# EAGLE board Schematic_EBook_v47 (EAGLE 9.7.0)
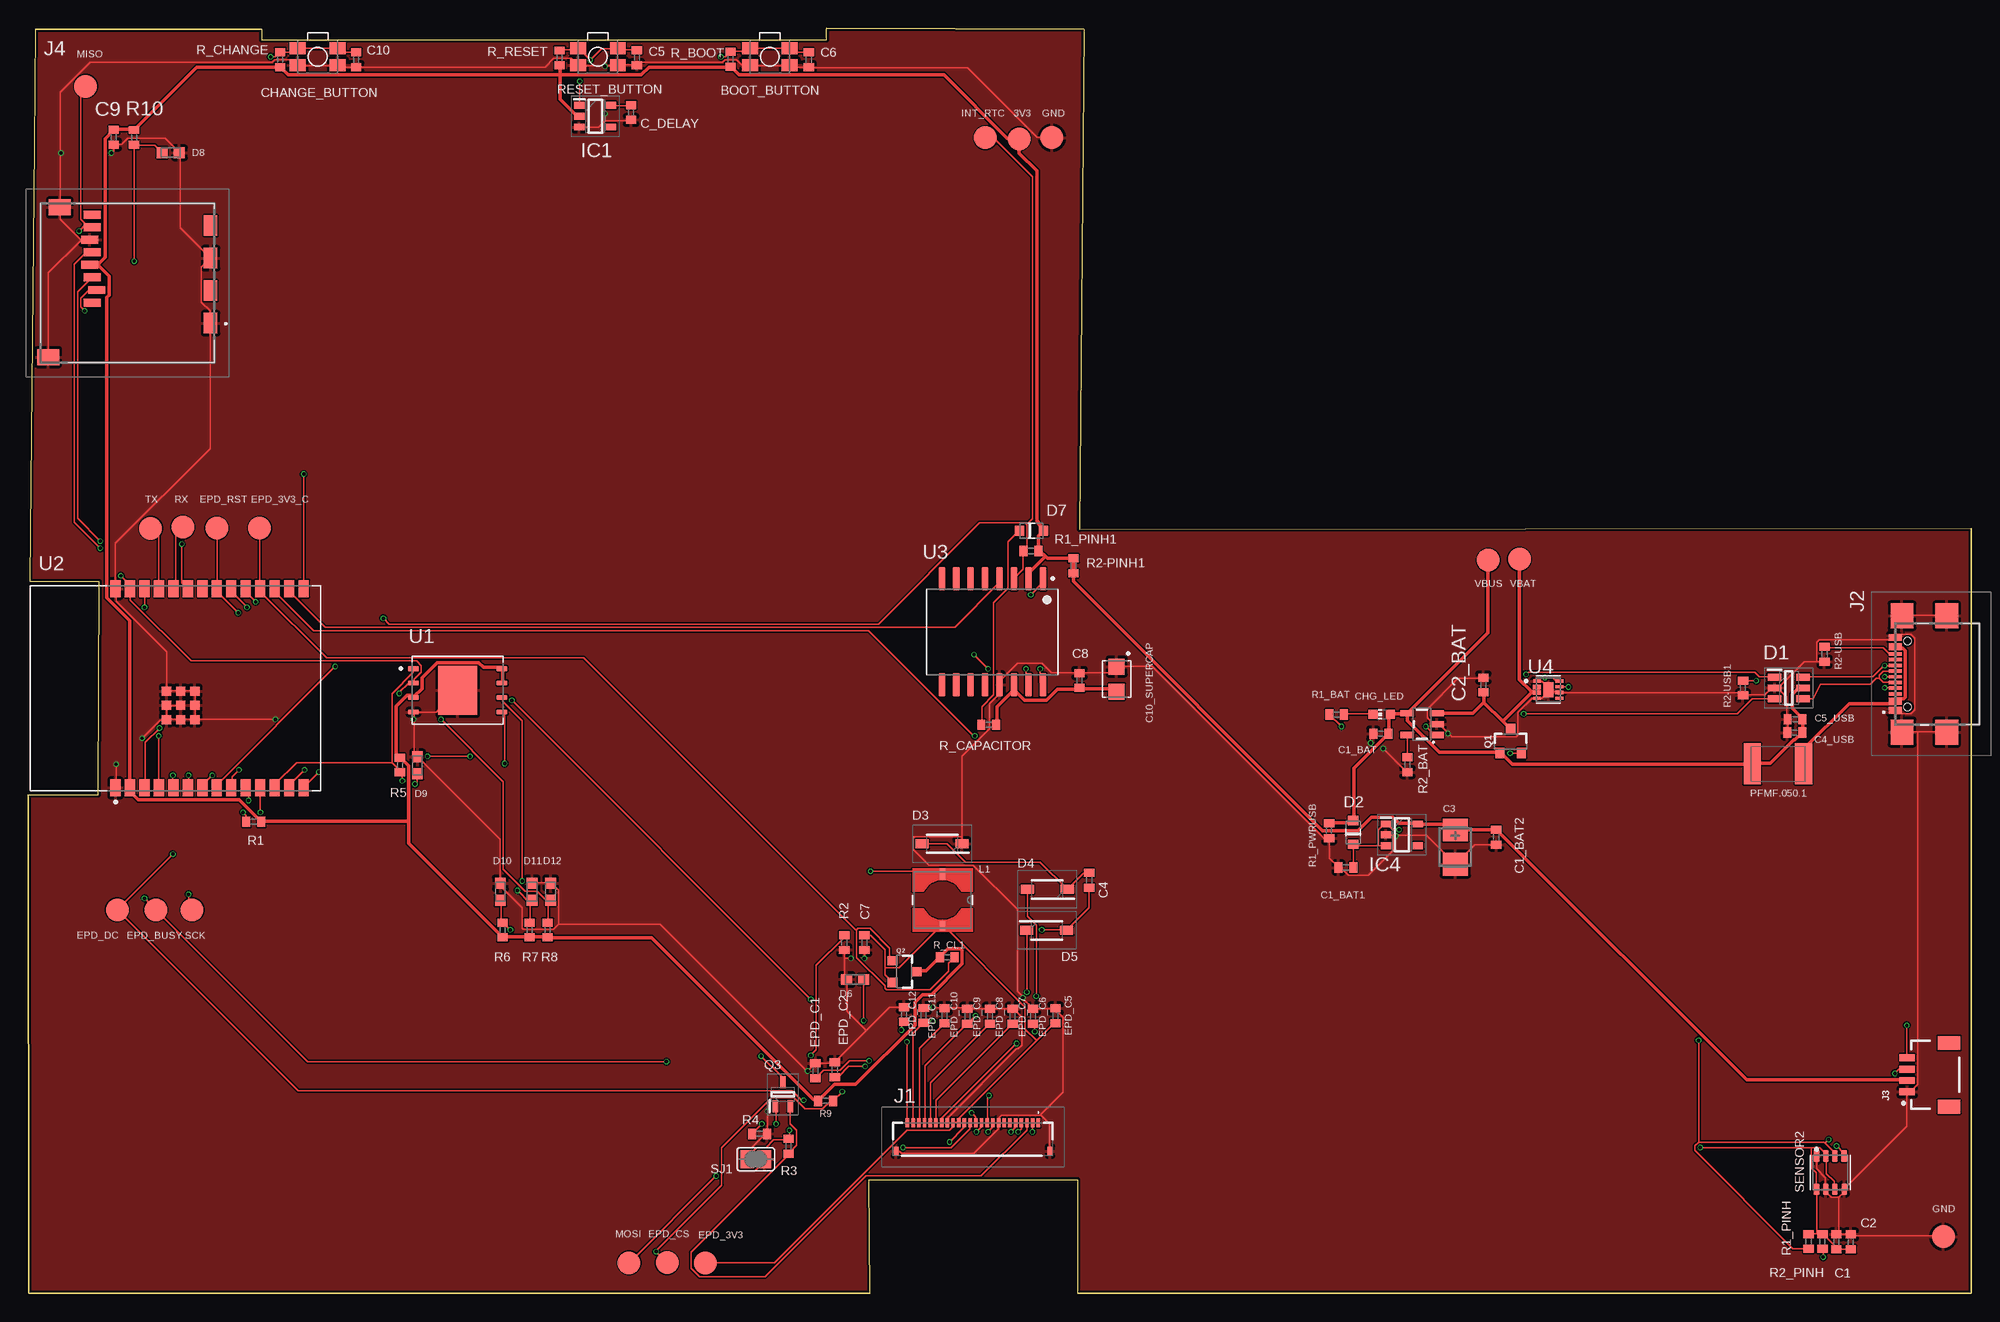
[diagram p0: board, top side]
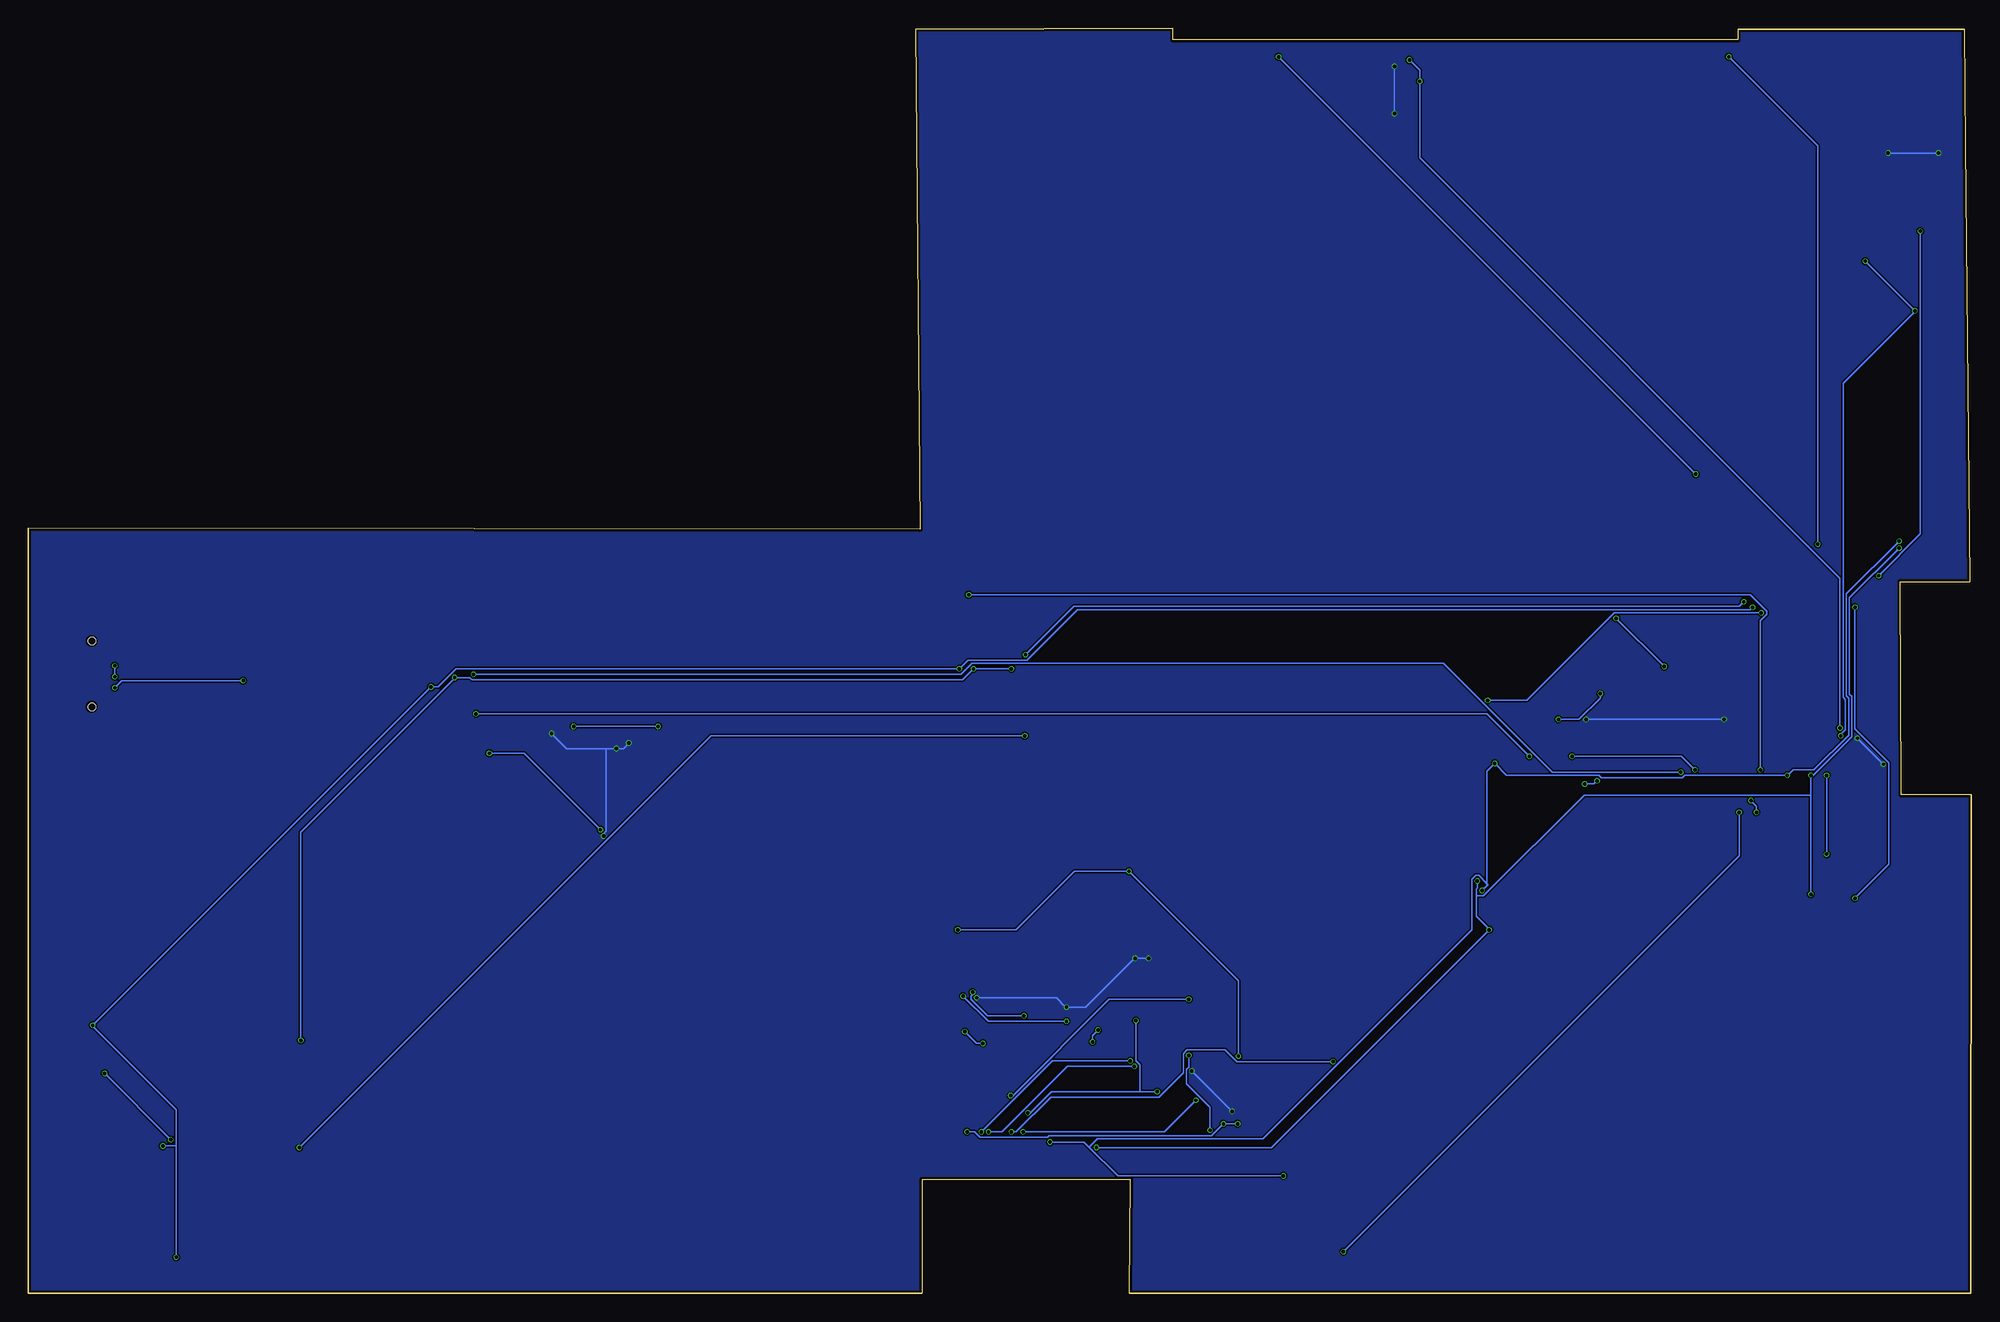
[diagram p1: board, bottom side, seen from below]

Size 170.61 x 111.08 mm. Coordinates in mm from the lower left corner, seen from the top.
Outline: 0.01,0 73.91,0
Outline: 92.11,0 170.61,0
Outline: 170.61,0 170.61,67.2
Outline: 92.71,111 70.11,111.08
Outline: 20.49,111.02 0.61,111
Outline: 0,43.8 0.01,0
Outline: 0.61,111 20.49,111.02
Outline: 70.11,111.08 92.71,111
Outline: 92.71,111 92.31,67.1 170.61,67.2
Outline: 170.61,67.2 170.61,0
Outline: 170.61,0 92.11,0
Outline: 73.91,0 0.01,0
Outline: 0.01,0 0,43.8
Outline: 73.91,0 73.81,10 92.01,10 92.11,10 92.11,0
Outline: 0,43.8 6.11,43.8 6.21,62.5 0.1,62.5 0.5,100.8 0.61,111
Outline: 20.49,111.02 20.49,110.1 70.11,110.1 70.11,111.08
Copper layers (1*16): Top 0.035mm / dielectric 1.6mm / Bottom 0.035mm
Design rules "jlcpcb-2layers.dru *": minimum track width 0.15mm, minimum drill 0.3mm, track to track 5mil, track to pad 5mil, pad to pad 5mil, via to via 5mil, smd to smd 5mil, copper to edge 0.2mm, drill to drill 6mil, minimum pad ring 10mil, minimum via ring 3mil, stop-mask expansion 4mil, vias tented up to drill 0mil, thermal gap 10mil
Net classes: 2 Power: width 0.3 mm

## Footprints (pad centres in the part's own frame; a part is rotated, then mirrored left to right if it is on the bottom)
MYBUTTON = smd 1.4 x 1.05: 1 1.75,0.75; 2 -1.75,0.75; 3 -1.75,-0.75; 4 1.75,-0.75
EAGLE-LTSPICE_C0402 = smd 0.7 x 0.9: 1 -0.65,0; 2 0.65,0
RCL_CT3528 = smd 2 x 2.2: + -1.5,0; - 1.5,0
CAPCP3225X100N = smd 1.4 x 1.4: 1 -1.1,0; 2 1.1,0
ADAFRUIT_CHIP-LED0603 = smd 0.8 x 0.8: A 0,-0.75; C 0,0.75
SOT95P280X145-6N = smd 1.2 x 0.6: 1 -1.25,0.95; 2 -1.25,0; 3 -1.25,-0.95; 4 1.25,-0.95; 5 1.25,0; 6 1.25,0.95
ESP32_WROVER_AVX---SD0805S020S1R0_AVX_SD0805S020S1R0_0 = smd 0.8 x 0.9: 1 -1.05,0; 2 1.05,0
SOD3716X135N = smd 1.15 x 0.8: 1 -1.75,0; 2 1.75,0
DIOC1608X36N = smd 0.97 x 0.94: 1 -0.75,0; 2 0.75,0
SOT95P280X125-5N = smd 0.9 x 0.6: 1 -1.4,0.95; 2 -1.4,0; 3 -1.4,-0.95; 4 1.4,-0.95; 5 1.4,0.95
SOT95P280X120-5N = smd 0.9 x 0.6: 1 -1.4,0.95; 2 -1.4,0; 3 -1.4,-0.95; 4 1.4,-0.95; 5 1.4,0.95
FH34SRJ24S05SH99 = smd 0.3 x 0.8: 1 5.75,1.45; 2 5.25,1.45; 3 4.75,1.45; 4 4.25,1.45; 5 3.75,1.45; 6 3.25,1.45; 7 2.75,1.45; 8 2.25,1.45; 9 1.75,1.45; 10 1.25,1.45; 11 0.75,1.45; 12 0.25,1.45; 13 -0.25,1.45; 14 -0.75,1.45; 15 -1.25,1.45; 16 -1.75,1.45; 17 -2.25,1.45; 18 -2.75,1.45; 19 -3.25,1.45; 20 -3.75,1.45; 21 -4.25,1.45; 22 -4.75,1.45; 23 -5.25,1.45; 24 -5.75,1.45 | smd 0.4 x 0.8: MP1 6.75,-1.05; MP2 -6.75,-1.05
SAMACSYS_PARTS_USB4110GFA = smd 0.3 x 1.15: A1 -3.35,3.678; A4 -2.55,3.678; A5 -1.25,3.678; A6 -0.25,3.678; A7 0.25,3.678; A8 1.25,3.678; A9 2.55,3.678; A12 3.35,3.678; B1 3.05,3.678; B4 2.25,3.678; B5 1.75,3.678; B6 0.75,3.678; B7 -0.75,3.678; B8 -1.75,3.678; B9 -2.25,3.678; B12 -3.05,3.678 | smd 2.18 x 2: MP1 -5.11,-0.827; MP2 5.11,-0.827; MP3 -5.11,3.103; MP4 5.11,3.103 | hole 0.65: -2.89,2.603; 2.89,2.603
JST04_1MM_RA = smd 0.6 x 1.35: 1 -1.5,0; 2 -0.5,0; 3 0.5,0; 4 1.5,0 | smd 1.2 x 2: NC1 2.8,-3.675; NC2 -2.8,-3.675
112ATAARR03ATTEND = smd 1.8 x 1.2: G1 10.6,10.4; G2 4.9,10.4; S1 7.75,10.4; S2 2.05,10.4 | smd 1.4 x 1.9: G3 13.6,-3.85; G4 0.45,-2.85 | smd 0.7 x 1.5: P1 8.8,0; P2 7.7,0.4; P3 6.6,0; P4 5.5,-0.2; P5 4.4,0; P6 3.3,-0.2; P7 2.2,0; P8 1.1,0
IND_4828-WE-TPC_WRE = smd 1.016 x 0.508: 1 -2.286,0 | smd 0.813 x 0.406: 2 2.286,0
ESP32_WROVER_SPARKFUN-IC-POWER_SOT23-5 = smd 0.55 x 1.2: 1 -0.95,-1.3; 2 0,-1.3; 3 0.95,-1.3; 4 0.95,1.3; 5 -0.95,1.3
ESP32C6_VARISTOR_CT/CN1812 = smd 1.5 x 3.6: 1 -2.25,0; 2 2.25,0
ESP32_WROVER_SPARKFUN-DISCRETESEMI_SOT23-3 = smd 0.8 x 0.9: 1 -0.95,-1; 2 0.95,-1; 3 0,1.1
SOT65P210X110-3N = smd 1.05 x 0.5: 1 -1.05,0.65; 2 -1.05,-0.65; 3 1.05,0
ESP32_WROVER_EAGLE-LTSPICE_R0402 = smd 0.7 x 0.9: 1 -0.65,0; 2 0.65,0
ESP32_WROVER_BME680_PSON80P300X300X100-8N = smd 1.016 x 0.5: 1 1.458,1.2; 2 1.458,0.4; 3 1.458,-0.4; 4 1.458,-1.2; 5 -1.458,-1.22; 6 -1.458,-0.4; 7 -1.458,0.4; 8 -1.458,1.2
SJ = smd 1.168 x 1.6: 1 -0.762,0; 2 0.762,0
TP20R = smd 2 x 2: TP 0,0
SON127P600X800X80-9N = smd 0.94 x 0.44: 1 -3.895,1.905; 2 -3.895,0.635; 3 -3.895,-0.635; 4 -3.895,-1.905; 5 3.895,-1.905; 6 3.895,-0.635; 7 3.895,0.635; 8 3.895,1.905 | smd 3.4 x 4.3: 9 0,0
XCVR_ESP32-C6-WROOM-1-N8 = smd 1.5 x 0.9: 1 -8.75,5.26; 2 -8.75,3.99; 3 -8.75,2.72; 4 -8.75,1.45; 5 -8.75,0.18; 6 -8.75,-1.09; 7 -8.75,-2.36; 8 -8.75,-3.63; 9 -8.75,-4.9; 10 -8.75,-6.17; 11 -8.75,-7.44; 12 -8.75,-8.71; 13 -8.75,-9.98; 14 -8.75,-11.25; 15 8.75,-11.25; 16 8.75,-9.98; 17 8.75,-8.71; 18 8.75,-7.44; 19 8.75,-6.17; 20 8.75,-4.9; 21 8.75,-3.63; 22 8.75,-2.36; 23 8.75,-1.09; 24 8.75,0.18; 25 8.75,1.45; 26 8.75,2.72; 27 8.75,3.99; 28 8.75,5.26 | smd 0.8 x 0.8: 29_1 -2.755,0.79; 29_2 -1.505,0.79; 29_3 -0.255,0.79; 29_4 -2.755,-0.46; 29_5 -1.505,-0.46; 29_6 -0.255,-0.46; 29_7 -2.755,-1.71; 29_8 -1.505,-1.71; 29_9 -0.255,-1.71
SOIC127P1032X265-16N = smd 2.05 x 0.59: 1 -4.655,4.445; 2 -4.655,3.175; 3 -4.655,1.905; 4 -4.655,0.635; 5 -4.655,-0.635; 6 -4.655,-1.905; 7 -4.655,-3.175; 8 -4.655,-4.445; 9 4.655,-4.445; 10 4.655,-3.175; 11 4.655,-1.905; 12 4.655,-0.635; 13 4.655,0.635; 14 4.655,1.905; 15 4.655,3.175; 16 4.655,4.445
SON50P200X200X80-9N = smd 0.76 x 0.27: 1 -0.985,0.75; 4 -0.985,-0.75; 5 0.985,-0.75; 6 0.985,-0.25; 7 0.985,0.25; 8 0.985,0.75 | smd 0.813 x 0.406: 2 -0.985,0.25; 3 -0.985,-0.25 | smd 0.9 x 1.3: 9 0,0

## Placement (x,y rotation side)
BOOT_BUTTON  BUTTON_CUSYOMV1  [MYBUTTON]  65.11,108.59 180 top
C1  100nF  [EAGLE-LTSPICE_C0402]  158.77,4.53 90 top
C1_BAT  4.7uF  [EAGLE-LTSPICE_C0402]  118.77,49.15 180 top
C1_BAT1  4.7uF  [EAGLE-LTSPICE_C0402]  115.71,37.4 180 top
C1_BAT2  4.7uF  [EAGLE-LTSPICE_C0402]  128.9,40.07 270 top
C2  100nF  [EAGLE-LTSPICE_C0402]  160.05,4.53 90 top
C2_BAT  4.7uF  [EAGLE-LTSPICE_C0402]  127.79,53.43 90 top
C3  100uF TANT  [RCL_CT3528]  125.32,39.2 270 top
C4  4.7uF/25V  [EAGLE-LTSPICE_C0402]  93.16,36.29 270 top
C4_USB  100nF  [EAGLE-LTSPICE_C0402]  155.12,49.25 180 top
C5  1uF  [EAGLE-LTSPICE_C0402]  53.44,108.51 270 top
C5_USB  4.7uF  [EAGLE-LTSPICE_C0402]  155.15,50.43 180 top
C6  100nF  [EAGLE-LTSPICE_C0402]  68.53,108.33 270 top
C7  10uF  [EAGLE-LTSPICE_C0402]  73.41,30.81 270 top
C8  100nF  [EAGLE-LTSPICE_C0402]  92.31,53.83 90 top
C9  100nF  [EAGLE-LTSPICE_C0402]  7.49,101.52 270 top
C10  100nF  [EAGLE-LTSPICE_C0402]  28.77,108.33 270 top
C10_SUPERCAP  CPH3225A  [CAPCP3225X100N]  95.57,53.94 270 top
C_DELAY  100nF  [EAGLE-LTSPICE_C0402]  52.92,103.69 270 top
CHANGE_BUTTON  BUTTON_CUSYOMV1  [MYBUTTON]  25.41,108.59 180 top
CHG_LED  &  [ADAFRUIT_CHIP-LED0603]  118.85,50.85 90 top
D1  USBLC6-2SC6Y  [SOT95P280X145-6N]  154.61,53.17 0 top
D2  ESP32_WROVER_AVX---SD0805S020S1R0_AVX_SD0805S020S1R0_0_0AVX_SD0805S020S1R0_0_0  [ESP32_WROVER_AVX---SD0805S020S1R0_AVX_SD0805S020S1R0_0]  116.35,40.48 90 top
D3  MBR0530  [SOD3716X135N]  80.24,39.48 180 top
D4  MBR0530  [SOD3716X135N]  89.48,35.48 180 top
D5  MBR0530  [SOD3716X135N]  89.42,31.88 0 top
D6  PGB1010603MR  [DIOC1608X36N]  72.61,27.57 0 top
D7  ESP32_WROVER_AVX---SD0805S020S1R0_AVX_SD0805S020S1R0_0_0AVX_SD0805S020S1R0_0_0  [ESP32_WROVER_AVX---SD0805S020S1R0_AVX_SD0805S020S1R0_0]  88.1,66.98 0 top
D8  PGB1010603MR  [DIOC1608X36N]  12.49,100.17 180 top
D9  PGB1010603MR  [DIOC1608X36N]  34.17,46.37 270 top
D10  PGB1010603MR  [DIOC1608X36N]  41.45,35.27 270 top
D11  PGB1010603MR  [DIOC1608X36N]  44.23,35.27 270 top
D12  PGB1010603MR  [DIOC1608X36N]  45.86,35.28 270 top
EPD_C1  1uF/50V  [EAGLE-LTSPICE_C0402]  69.11,19.55 90 top
EPD_C2  1uF/50V  [EAGLE-LTSPICE_C0402]  70.82,19.65 90 top
EPD_C5  0.1uF/50V  [EAGLE-LTSPICE_C0402]  90.2,24.39 90 top
EPD_C6  1uF/50V  [EAGLE-LTSPICE_C0402]  88.23,24.35 90 top
EPD_C7  1uF/50V  [EAGLE-LTSPICE_C0402]  86.44,24.35 90 top
EPD_C8  1uF/50V  [EAGLE-LTSPICE_C0402]  84.45,24.35 90 top
EPD_C9  1uF/50V  [EAGLE-LTSPICE_C0402]  82.46,24.35 90 top
EPD_C10  1uF/50V  [EAGLE-LTSPICE_C0402]  80.46,24.39 90 top
EPD_C11  1uF/50V  [EAGLE-LTSPICE_C0402]  78.62,24.42 90 top
EPD_C12  1uF/50V  [EAGLE-LTSPICE_C0402]  76.9,24.49 90 top
IC1  BD5229G-TR  [SOT95P280X125-5N]  49.78,103.37 0 top
IC4  XC6220A331MR-G  [SOT95P280X120-5N]  120.62,40.27 0 top
J1  FH34SRJ-24S-0.5SH_99_  [FH34SRJ24S05SH99]  82.95,13.54 0 top
J2  SAMACSYS_PARTS_USB4110-GF-A  [SAMACSYS_PARTS_USB4110GFA]  167.65,54.4 90 top
J3  QWIIC_RIGHT_ANGLE  [JST04_1MM_RA]  165,19.2 90 top
J4  112A-TAAR-R03_ATTEND  [112ATAARR03ATTEND]  5.59,95.81 270 top
L1  68uH  [IND_4828-WE-TPC_WRE]  80.28,34.55 270 top
MCP73831  ESP32_WROVER_SPARKFUN-IC-POWER_MCP73831  [ESP32_WROVER_SPARKFUN-IC-POWER_SOT23-5]  122.39,49.99 90 top
PFMF.050.1  ESP32C6_VARISTORCN1812  [ESP32C6_VARISTOR_CT/CN1812]  153.65,46.5 180 top
Q1  20V/4.2A/52mΩ/1.4W  [ESP32_WROVER_SPARKFUN-DISCRETESEMI_SOT23-3]  130.17,48.46 0 top
Q2  20V/4.2A/52mΩ/1.4W  [ESP32_WROVER_SPARKFUN-DISCRETESEMI_SOT23-3]  76.89,28.26 270 top
Q3  SI1308EDL-T1-GE3  [SOT65P210X110-3N]  66.25,17.48 90 top
R1  10K  [ESP32_WROVER_EAGLE-LTSPICE_R0402]  19.79,41.41 180 top
R1_BAT  200  [ESP32_WROVER_EAGLE-LTSPICE_R0402]  114.9,50.83 0 top
R1_PINH  10K  [ESP32_WROVER_EAGLE-LTSPICE_R0402]  156.34,4.57 90 top
R1_PINH1  10K  [ESP32_WROVER_EAGLE-LTSPICE_R0402]  88.05,65.19 0 top
R1_PWRUSB  100K  [ESP32_WROVER_EAGLE-LTSPICE_R0402]  114.23,40.64 90 top
R2  2.2  [ESP32_WROVER_EAGLE-LTSPICE_R0402]  71.65,30.81 90 top
R2-PINH1  10K  [ESP32_WROVER_EAGLE-LTSPICE_R0402]  91.78,63.89 90 top
R2-USB  5k1  [ESP32_WROVER_EAGLE-LTSPICE_R0402]  157.75,56.13 270 top
R2-USB1  5k1  [ESP32_WROVER_EAGLE-LTSPICE_R0402]  150.58,53.17 90 top
R2_BAT  2K  [ESP32_WROVER_EAGLE-LTSPICE_R0402]  121.11,46.42 90 top
R2_PINH  10K  [ESP32_WROVER_EAGLE-LTSPICE_R0402]  157.56,4.57 90 top
R3  0.47  [ESP32_WROVER_EAGLE-LTSPICE_R0402]  66.75,12.92 90 top
R4  10K  [ESP32_WROVER_EAGLE-LTSPICE_R0402]  64.21,14.01 0 top
R5  10K  [ESP32_WROVER_EAGLE-LTSPICE_R0402]  32.63,46.41 90 top
R6  10K  [ESP32_WROVER_EAGLE-LTSPICE_R0402]  41.65,31.91 270 top
R7  10K  [ESP32_WROVER_EAGLE-LTSPICE_R0402]  44.01,31.91 270 top
R8  10K  [ESP32_WROVER_EAGLE-LTSPICE_R0402]  45.59,31.91 270 top
R9  10K  [ESP32_WROVER_EAGLE-LTSPICE_R0402]  70.01,16.91 180 top
R10  10K  [ESP32_WROVER_EAGLE-LTSPICE_R0402]  9.27,101.51 90 top
R_BOOT  10K  [ESP32_WROVER_EAGLE-LTSPICE_R0402]  61.67,108.37 90 top
R_CAPACITOR  15  [ESP32_WROVER_EAGLE-LTSPICE_R0402]  84.33,49.94 180 top
R_CHANGE  10K  [ESP32_WROVER_EAGLE-LTSPICE_R0402]  22.1,108.34 90 top
R_CL1  10K  [ESP32_WROVER_EAGLE-LTSPICE_R0402]  80.69,29.53 0 top
R_RESET  10K  [ESP32_WROVER_EAGLE-LTSPICE_R0402]  46.64,108.49 90 top
RESET_BUTTON  BUTTON_CUSYOMV1  [MYBUTTON]  50.01,108.59 180 top
SENSOR2  ESP32_WROVER_BME680_BME680  [ESP32_WROVER_BME680_PSON80P300X300X100-8N]  158.25,10.62 90 top
SJ1  &  [SJ]  63.87,11.79 180 top
TP1  TPTP20R  [TP20R]  10.72,67.19 0 top
TP2  TPTP20R  [TP20R]  13.55,67.28 0 top
TP3  TPTP20R  [TP20R]  130.96,64.49 0 top
TP4  TPTP20R  [TP20R]  168.18,4.99 0 top
TP5  TPTP20R  [TP20R]  89.87,101.49 0 top
TP6  TPTP20R  [TP20R]  5.02,105.99 0 top
TP7  TPTP20R  [TP20R]  52.74,2.69 0 top
TP8  TPTP20R  [TP20R]  14.36,33.69 0 top
TP9  TPTP20R  [TP20R]  11.18,33.69 0 top
TP10  TPTP20R  [TP20R]  56.1,2.71 0 top
TP11  TPTP20R  [TP20R]  7.8,33.69 0 top
TP12  TPTP20R  [TP20R]  16.55,67.21 0 top
TP13  TPTP20R  [TP20R]  20.3,67.21 0 top
TP14  TPTP20R  [TP20R]  128.2,64.39 0 top
TP15  TPTP20R  [TP20R]  84.05,101.49 0 top
TP16  TPTP20R  [TP20R]  87,101.39 0 top
TP17  TPTP20R  [TP20R]  59.45,2.69 0 top
U1  W25Q512JVEIQ  [SON127P600X800X80-9N]  37.7,52.96 0 top
U2  ESP32-C6-WROOM-1-N8  [XCVR_ESP32-C6-WROOM-1-N8]  12.91,53.14 90 top
U3  DS3231SN#  [SOIC127P1032X265-16N]  84.66,58.1 270 top
U4  MAX17048G+T10  [SON50P200X200X80-9N]  133.48,53.02 0 top

## Library data of the parts
BOOT_BUTTON CHANGE_BUTTON CHG_LED PFMF.050.1 RESET_BUTTON SJ1 TP1-TP17 = DeskAssistant v19 v1
C1 C1_BAT C1_BAT1 C1_BAT2 C2 C2_BAT C4 C4_USB C5 C5_USB C6-C10 C_DELAY EPD_C1 EPD_C2 EPD_C5-EPD_C12 = DeskAssistant v19 v1; SPICEMODEL: NONE; SPICEPREFIX: C
C3 = DeskAssistant v19 v1; SPICEPREFIX: C
C10_SUPERCAP = DeskAssistant v19 v1; AVAILABILITY: Not in stock; CHECK_PRICES: https://www.snapeda.com/parts/CPH3225A/Seiko+Instruments/view-part/?ref=eda; DESCRIPTION: 11 mF (EDLC) Supercapacitor 3.3 V 1210 (3225 Metric) - -; MF: Seiko Instruments; MP: CPH3225A; PACKAGE: 1210 Seiko; PRICE: None; PURCHASE-URL: https://www.snapeda.com/api/url_track_click_mouser/?unipart_id=562593&manufacturer=Seiko Instruments&part_name=CPH3225A&search_term=None; SNAPEDA_LINK: https://www.snapeda.com/parts/CPH3225A/Seiko+Instruments/view-part/?ref=snap
D1 = DeskAssistant v19 v1; AVAILABILITY: In Stock; CHECK_PRICES: https://www.snapeda.com/parts/USBLC6-2SC6Y/STMicroelectronics/view-part/?ref=eda; DESCRIPTION: 17V Clamp 5A (8/20µs) Ipp Tvs Diode Surface Mount SOT-23-6; MF: STMicroelectronics; MP: USBLC6-2SC6Y; PACKAGE: SOT-23-6 STMicroelectronics; PRICE: None; SNAPEDA_LINK: https://www.snapeda.com/parts/USBLC6-2SC6Y/STMicroelectronics/view-part/?ref=snap
D2 D7 = DeskAssistant v19 v1; CENTROID_NOT_SPECIFIED: No; DATASHEET: http://datasheets.avx.com/schottky.pdf; DIGIKEY_DESCRIPTION: DIODE SCHOTTKY 20V 1A 0805; DIGIKEY_PART_NUMBER: 478-7800-1-ND; LEAD_FREE: yes; MF: AVX; MOUSER_PART_NUMBER: 581-SD0805S020S1R0; PACKAGE: 0805 (2012 metric); PREFIX: D; ROHS: yes; TEMPERATURE_RANGE_HIGH: +125°C; TEMPERATURE_RANGE_LOW: -55°C
D3-D5 = DeskAssistant v19 v1; AVAILABILITY: In Stock; CHECK_PRICES: https://www.snapeda.com/parts/MBR0530/Onsemi/view-part/?ref=eda; DESCRIPTION: Diode Schottky 30 V 500mA Surface Mount SOD-123; MF: ON Semiconductor; MP: MBR0530; PACKAGE: SOD-123-2 ON Semiconductor; PRICE: None; PURCHASE-URL: https://www.snapeda.com/api/url_track_click_mouser/?unipart_id=179458&manufacturer=ON Semiconductor&part_name=MBR0530&search_term=None; SNAPEDA_LINK: https://www.snapeda.com/parts/MBR0530/Onsemi/view-part/?ref=snap
D6 D8-D12 = DeskAssistant v19 v1; AVAILABILITY: In Stock; CHECK_PRICES: https://www.snapeda.com/parts/PGB1010603MR/Littelfuse/view-part/?ref=eda; DESCRIPTION: 150V (Typ) Clamp - Ipp Tvs Diode Surface Mount 0603 (1608 Metric); MF: Littelfuse Inc.; MP: PGB1010603MR; PACKAGE: 0603 Littelfuse Inc.; PRICE: None; PURCHASE-URL: https://www.snapeda.com/api/url_track_click_mouser/?unipart_id=5659453&manufacturer=Littelfuse Inc.&part_name=PGB1010603MR&search_term=None; SNAPEDA_LINK: https://www.snapeda.com/parts/PGB1010603MR/Littelfuse/view-part/?ref=snap
IC1 = DeskAssistant v19 v1; DESCRIPTION: Voltage Detector with Adjustable Delay Time: CMOS processes are utilized to develop high precision, low current consumption CMOS reset ICs that allow arbitrary setting of the delay time. The extensive lineup includes both Nch Open Drain and CMOS output types in a wide range of detection voltages (from 2.3V to 6.0V, in 0.1V steps), enabling selection of the ideal solution based on customer requirements. In addition, the entire series is of course both lead-free and RoHS-compliant.; HEIGHT: 1.25mm; MANUFACTURER_NAME: ROHM Semiconductor; MANUFACTURER_PART_NUMBER: BD5229G-TR; MOUSER_PART_NUMBER: 755-BD5229G-TR; MOUSER_PRICE-STOCK: https://www.mouser.co.uk/ProductDetail/ROHM-Semiconductor/BD5229G-TR?qs=4kLU8WoGk0vvnhrrYwdszw%3D%3D
IC4 = DeskAssistant v19 v1; DESCRIPTION: LDO Voltage Regulators; HEIGHT: 1.2mm; MANUFACTURER_NAME: Torex; MANUFACTURER_PART_NUMBER: XC6220A331MR-G; MOUSER_PART_NUMBER: 865-XC6220A331MR-G; MOUSER_PRICE-STOCK: https://www.mouser.co.uk/ProductDetail/Torex-Semiconductor/XC6220A331MR-G?qs=AsjdqWjXhJ8ZSWznL1J0gg%3D%3D
J1 = DeskAssistant v19 v1; DESCRIPTION: 24 Position FFC, FPC Connector Contacts, Top and Bottom 0.020" (0.50mm) Surface Mount, Right Angle; HEIGHT: 1.1mm; MANUFACTURER_NAME: Hirose; MANUFACTURER_PART_NUMBER: FH34SRJ-24S-0.5SH(99); MOUSER_PART_NUMBER: 798-FH34SRJ24S05SH99; MOUSER_PRICE-STOCK: https://www.mouser.co.uk/ProductDetail/Hirose-Connector/FH34SRJ-24S-0.5SH99?qs=vcbW%252B4%252BSTIpKBl5ap9J8Fw%3D%3D
J2 = DeskAssistant v19 v1; DESCRIPTION: CONN USB 2.0 TYPE-C R/A SMT; HEIGHT: 3.26mm; MANUFACTURER_NAME: GCT (GLOBAL CONNECTOR TECHNOLOGY); MANUFACTURER_PART_NUMBER: USB4110-GF-A; MOUSER_PART_NUMBER: 640-USB4110-GF-A; MOUSER_PRICE-STOCK: https://www.mouser.co.uk/ProductDetail/GCT/USB4110-GF-A?qs=KUoIvG%2F9IlYiZvIXQjyJeA%3D%3D
J3 = DeskAssistant v19 v1; PROD_ID: CONN-13694
J4 = DeskAssistant v19 v1; DESCRIPTION: Micro SD Card Socket, Push-Push Type, Top Mount, SMT, H=1.83mm, 10u; HEIGHT: 1.9mm; MANUFACTURER_NAME: ATTEND; MANUFACTURER_PART_NUMBER: 112A-TAAR-R03 ATTEND
L1 = DeskAssistant v19 v1; COPYRIGHT: Copyright (C) 2024 Ultra Librarian. All rights reserved.; MANUFACTURER_PART_NUMBER: 744043680; MFR_NAME: Wurth Electronics
MCP73831 = DeskAssistant v19 v1; PROD_ID: IC-09995
Q1 Q2 = DeskAssistant v19 v1; PROD_ID: TRAN-14388
Q3 = DeskAssistant v19 v1; AVAILABILITY: In Stock; CHECK_PRICES: https://www.snapeda.com/parts/SI1308EDL-T1-GE3/Vishay+Siliconix/view-part/?ref=eda; DESCRIPTION: Si1308EDL-T1-GE3 N-channel MOSFET Transistor, 1.5 A, 30 V, 3-Pin SC-70 | Siliconix / Vishay SI1308EDL-T1-GE3; MF: Vishay Siliconix; MP: SI1308EDL-T1-GE3; PACKAGE: SOT-323 Vishay Semiconductor; PRICE: None; PURCHASE-URL: https://www.snapeda.com/api/url_track_click_mouser/?unipart_id=274603&manufacturer=Vishay Siliconix&part_name=SI1308EDL-T1-GE3&search_term=None; SNAPEDA_LINK: https://www.snapeda.com/parts/SI1308EDL-T1-GE3/Vishay+Siliconix/view-part/?ref=snap
R1 R1_BAT R1_PINH R1_PINH1 R1_PWRUSB R2 R2-PINH1 R2-USB R2-USB1 R2_BAT R2_PINH R3-R10 R_BOOT R_CAPACITOR R_CHANGE R_CL1 R_RESET = DeskAssistant v19 v1; SPICEMODEL: NONE; SPICEPREFIX: R
SENSOR2 = DeskAssistant v19 v1; AVAILABILITY: Unavailable; DESCRIPTION: Integrated Environmental Unit; MF: Bosch Sensortec; MP: BME680; PACKAGE: LGA-8 Bosch Tools; PRICE: None
U1 = DeskAssistant v19 v1; AVAILABILITY: In Stock; CHECK_PRICES: https://www.snapeda.com/parts/W25Q512JVEIQ/Winbond+Electronics/view-part/?ref=eda; DESCRIPTION: FLASH - NOR Memory IC 512Mb (64M x 8) SPI - Quad I/O 133 MHz 8-WSON (8x6); MF: Winbond Electronics; MP: W25Q512JVEIQ; PACKAGE: Package; PRICE: None; SNAPEDA_LINK: https://www.snapeda.com/parts/W25Q512JVEIQ/Winbond+Electronics/view-part/?ref=snap
U2 = DeskAssistant v19 v1; AVAILABILITY: In Stock; CHECK_PRICES: https://www.snapeda.com/parts/ESP32-C6-WROOM-1-N8/Espressif+Systems/view-part/?ref=eda; DESCRIPTION: Multiprotocol Modules ESP32-C6 module, Wi-Fi 6 in 2.4 GHz band, Bluetooth 5, Zigbee 3.0 and Thread. ESP34-WROOM Compatible - ENGINEERING SAMPLE; MF: Espressif Systems; MP: ESP32-C6-WROOM-1-N8; PACKAGE: None; PRICE: None; SNAPEDA_LINK: https://www.snapeda.com/parts/ESP32-C6-WROOM-1-N8/Espressif+Systems/view-part/?ref=snap
U3 = DeskAssistant v19 v1; AVAILABILITY: In Stock; CHECK_PRICES: https://www.snapeda.com/parts/DS3231SN%23/Analog+Devices/view-part/?ref=eda; DESCRIPTION: Extremely Accurate I²C-Integrated RTC/TCXO/Crystal; MF: Analog Devices; MP: DS3231SN#; PACKAGE: SOIC-16 Maxim; PRICE: None; PURCHASE-URL: https://www.snapeda.com/api/url_track_click_mouser/?unipart_id=99048&manufacturer=Analog Devices&part_name=DS3231SN#&search_term=None; SNAPEDA_LINK: https://www.snapeda.com/parts/DS3231SN%23/Analog+Devices/view-part/?ref=snap
U4 = DeskAssistant v19 v1; AVAILABILITY: In Stock; CHECK_PRICES: https://www.snapeda.com/parts/MAX17048G+T10/Analog+Devices/view-part/?ref=eda; DESCRIPTION: 3µA 1-Cell/2-Cell Fuel Gauge with ModelGauge; MF: Analog Devices; MP: MAX17048G+T10; PACKAGE: TDFN-8 Maxim; PRICE: None; PURCHASE-URL: https://www.snapeda.com/api/url_track_click_mouser/?unipart_id=329239&manufacturer=Analog Devices&part_name=MAX17048G+T10&search_term=None; SNAPEDA_LINK: https://www.snapeda.com/parts/MAX17048G+T10/Analog+Devices/view-part/?ref=snap

## Nets
3V3 [Power]: C1_BAT2.1 C3.+ C9.1 D7.2 IC1.2 IC4.5 J3.2 J4.P4 Q2.3 R1.1 R1_PINH1.2 R2-PINH1.1 R2-PINH1.2 R5.2 R6.2 R7.2 R8.2 R9.2 R10.2 R_BOOT.1 R_CHANGE.1 R_CL1.1 R_RESET.1 TP16.TP U1.3 U1.7 U1.8 U2.2 U3.2
32KHZ: U2.9 U3.1
DN: D1.4 J2.A7 J2.B7
DP: D1.6 J2.A6 J2.B6
EPD_3V3: C7.1 EPD_C5.1 J1.15 J1.16 L1.2 Q2.2 TP17.TP
EPD_3V3_C: Q2.1 R_CL1.2 TP13.TP U2.18
EPD_BUSY: J1.9 TP9.TP U2.26
EPD_CS: D6.2 J1.12 R9.1 TP10.TP U2.11
EPD_DC: J1.11 TP11.TP U2.5
EPD_RST: J1.10 TP12.TP U2.21
FLASH_CS: D9.2 R5.1 U1.1 U2.12
GDR: J1.2 Q3.1 R4.1
GND: BOOT_BUTTON.1 BOOT_BUTTON.2 C1.2 C1_BAT1.2 C1_BAT2.2 C1_BAT.2 C2.2 C2_BAT.2 C3.- C4_USB.2 C5.2 C5_USB.2 C6.2 C7.2 C8.2 C9.2 C10.2 C10_SUPERCAP.1 C_DELAY.2 CHANGE_BUTTON.1 CHANGE_BUTTON.2 D1.2 D3.1 D6.1 D8.1 D9.1 D10.1 D11.1 D12.1 EPD_C1.2 EPD_C2.2 EPD_C5.2 EPD_C6.2 EPD_C7.2 EPD_C8.2 EPD_C9.2 EPD_C10.2 EPD_C11.2 EPD_C12.2 IC1.3 IC4.2 J1.8 J1.17 J1.MP1 J1.MP2 J2.A1 J2.A12 J2.B1 J2.B12 J2.MP1 J2.MP2 J2.MP3 J2.MP4 J3.1 J4.G1 J4.G2 J4.G3 J4.G4 J4.P6 MCP73831.2 R1_PWRUSB.1 R2-USB1.1 R2-USB.2 R2.1 R2_BAT.1 R4.2 RESET_BUTTON.1 RESET_BUTTON.2 SENSOR2.1 SENSOR2.5 SENSOR2.7 SJ1.1 TP4.TP TP5.TP U1.4 U1.9 U2.1 U2.28 U2.29_1 U2.29_2 U2.29_3 U2.29_4 U2.29_5 U2.29_6 U2.29_7 U2.29_8 U2.29_9 U3.13 U4.1 U4.4 U4.6 U4.9
GPIO8: R1.2 U2.10
I2C_PW: C1.1 C2.1 R1_PINH.2 R2_PINH.2 SENSOR2.2 SENSOR2.6 SENSOR2.8 U2.17
INT_RTC: R1_PINH1.1 TP15.TP U2.8 U3.3
IO/BOOT: BOOT_BUTTON.3 BOOT_BUTTON.4 C6.1 R_BOOT.2 U2.15
IO/CHANGE: C10.1 CHANGE_BUTTON.3 CHANGE_BUTTON.4 R_CHANGE.2 U2.23
MISO: D12.2 J4.P7 R8.1 TP6.TP U1.2 U2.27
MOSI: D11.2 J1.14 J4.P3 R7.1 TP7.TP U1.5 U2.7
N$1: J2.A5 R2-USB1.2
N$2: J2.B5 R2-USB.1
N$3: C1_BAT1.1 D2.1 IC4.1 IC4.3 Q1.2
N$5: MCP73831.1 R1_BAT.1
N$6: C4.1 D3.2 D4.1
N$7: CHG_LED.C R1_BAT.2
N$8: MCP73831.5 R2_BAT.2
N$10: EPD_C2.1 J1.5
N$11: EPD_C1.1 J1.4
N$12: C_DELAY.1 IC1.5
N$14: D7.1 R_CAPACITOR.2
N$20: EPD_C12.1 J1.24
N$22: EPD_C10.1 J1.22
N$23: EPD_C8.1 J1.20
N$25: EPD_C6.1 J1.18
N$26: EPD_C7.1 J1.19
PREVGH: D5.1 EPD_C9.1 J1.21
PREVGL: D4.2 EPD_C11.1 J1.23
RESE: J1.3 Q3.2 R3.1
RESE': R2.2 R3.2 SJ1.2
RESET: C5.1 IC1.1 R_RESET.2 RESET_BUTTON.3 RESET_BUTTON.4 U2.3
RTC_RST: U2.16 U3.4
RX: TP2.TP U2.24
SCK: D10.2 J1.13 J4.P5 R6.1 TP8.TP U1.6 U2.6
SCL: J3.4 R2_PINH.1 SENSOR2.4 U2.20 U3.16 U4.7
SDA: J3.3 R1_PINH.1 SENSOR2.3 U2.19 U3.15 U4.8
SRC: C4.2 D5.2 L1.1 Q3.3
SS_SD: D8.2 J4.P2 R10.1 U2.4
TX: TP1.TP U2.25
USB_D+: D1.1 U2.14
USB_D-: D1.3 U2.13
VBAT [Power]: C2_BAT.1 MCP73831.3 Q1.3 TP3.TP U4.2 U4.3
VBUS [Power]: C1_BAT.1 C4_USB.1 C5_USB.1 CHG_LED.A D1.5 D2.2 MCP73831.4 PFMF.050.1.2 Q1.1 R1_PWRUSB.2 TP14.TP
VRTC [Power]: C8.1 C10_SUPERCAP.2 R_CAPACITOR.1 U3.14
VUSB [Power]: J2.A4 J2.A9 J2.B4 J2.B9 PFMF.050.1.1

## Tracks (layer width: path | path; a pad name or v marks a point on that pad's centre or on a via)
3V3
  Top 0.3: Q2.3 78.06,28.32 78.82,28.32 79.93,29.43 R_CL1.1 80.06,29.57 80.76,30.26 81.86,30.26 82,30.12 82,28.95 79.3,26.25 78.54,26.25 77.85,25.55 77.85,23.55 72.65,18.35 70.78,18.35 69.4,16.97 R9.2 69.26,17.04 68.92,17.04 54.72,31.23 45.72,31.23 R8.2 45.58,31.3 44.12,31.3 R7.2 43.99,31.3 41.7,31.3 R6.2 41.56,31.37 33.39,39.54 33.39,41.48 | U1.7 41.63,53.6 41.63,54.85 U1.8 41.49,54.98 39.97,54.98 39.55,55.4 35.88,55.4 34.57,54.08 34.57,53.12 33.87,52.42 U1.3 33.81,52.42 33.71,52.52 33.25,52.52 32.3,51.58 32.3,47.39 R5.2 32.77,46.95 33.39,46.33 33.39,41.48 | 33.39,41.48 33.25,41.48 20.58,41.48 R1.1 18.5,43.35 9.64,43.35 8.94,44.04 8.94,44.39 U2.2 8.88,44.53 8.88,59.07 6.87,61.08 6.87,87.46 7.08,87.67 7.08,89.33 6.17,90.23 6.11,90.37 | J3.2 164.96,18.77 150.91,18.77 129.02,40.65 C1_BAT2.1 128.89,40.72 125.42,40.72 C3.+ 125.28,40.72 124.8,41.2 122.03,41.2 IC4.5 121.89,41.27 120.37,41.27 119.81,41.83 117.94,41.83 116.77,40.65 113.65,40.65 91.77,62.53 91.77,63.09 R2-PINH1.1 91.77,63.29 91.77,64.47 R2-PINH1.2 91.63,64.54 89.48,64.54 89.31,64.71 | 6.11,90.37 5.41,90.37 J4.P4 | 6.11,90.37 6.73,91 6.73,101.38 7.42,102.08 C9.1 7.56,102.21 9.22,102.21 R10.2 9.36,102.28 14.76,107.68 22.03,107.68 R_CHANGE.1 22.17,107.61 22.79,106.99 46.55,106.99 46.69,106.99 | 89.31,64.71 88.86,65.16 R1_PINH1.2 88.72,65.23 88.72,66.55 89.14,66.97 D7.2 88.57,67.83 88.57,98.57 87,100.14 TP16.TP 86.99,101.45 85.95,101.45 80.41,106.99 62.41,106.99 61.78,107.61 R_BOOT.1 61.64,107.68 54.51,107.68 53.82,106.99 46.82,106.99 46.69,106.99 | U3.2 87.89,62.81 87.89,63.29 89.21,64.61 89.31,64.71
  Top 0.3: 46.69,106.99 46.69,104.84 48.14,103.39 48.35,103.39 IC1.2 | 46.69,106.99 46.69,107.82 R_RESET.1
32KHZ  (via drill 0.3)
  Top 0.15: v18.5,45.98 17.88,45.36 17.88,44.46 U2.9 | v88.03,61.35 89.07,62.39 89.07,62.74 U3.1
  Bottom 0.15: v18.5,45.98 18.5,59.07 17.95,59.62 17.95,59.9 19.4,61.35 v88.03,61.35
DN
  Top 0.15: 162.54,54.02 162.89,53.67 163.93,53.67 J2.B7 | 162.54,54.02 162.54,54.29 162.89,54.64 163.93,54.64 J2.A7 | D1.4 156.76,52.22 157.39,53.48 161.74,53.48 162.27,54.02 162.54,54.02
DP  (via drill 0.3)
  Top 0.15: v163.03,54.15 163.93,54.15 J2.A6 | J2.B6 163.93,55.12 v163.03,55.12 162.96,55.12 161.99,54.15 155.89,54.15 D1.6
  Bottom 0.15: v163.03,55.12 v163.03,54.15
EPD_3V3
  Top 0.15: C7.1 73.96,31.46 75.22,30.2 75.22,28.6 | 75.22,28.6 75.22,27.98 75.84,27.35 Q2.2 | 75.22,28.6 75.29,28.6 76.46,28.6 80.06,32.2 80.27,32.2 L1.2 80.34,32.2 80.48,32.2 87.54,25.14 87.54,23.2 88.51,22.23 88.55,22.2 | 88.55,22.2 81.66,15.3 81.66,15.1 J1.15 81.66,15.03 81.24,15.03 J1.16 81.17,14.96 81.17,14.61 80.9,14.34 77.16,14.34 65.52,2.7 59.5,2.7 TP17.TP | 88.55,22.2 90.04,23.68 90.17,23.68 EPD_C5.1
EPD_3V3_C
  Top 0.15: TP13.TP 20.3,67.17 20.3,61.91 U2.18 20.37,61.84 20.37,61.63 26.19,55.82 48.76,55.82 72.65,31.92 72.72,31.92 | 72.72,31.92 72.86,32.06 73.9,32.06 75.64,30.32 75.64,29.28 Q2.1 | 72.72,31.92 72.72,29.5 75.22,27.01 75.22,26.8 75.36,26.66 79.17,26.66 80.81,28.3 80.81,29.02 R_CL1.2
EPD_BUSY  (via drill 0.3)
  Top 0.15: v84.29,14.2 84.64,14.54 84.64,14.96 J1.9 | v56.03,20.36 24.53,20.36 11.23,33.66 TP9.TP 11.16,33.73 v10.19,34.69 | v10.19,60.25 10.19,61.84 U2.26
  Bottom 0.15: v84.29,14.2 83.87,14.2 80.83,17.24 71.34,17.24 69.19,19.39 69.19,21.05 68.85,21.4 65.52,21.4 64.48,20.36 v56.03,20.36 | v10.19,60.25 10.19,49.58 7.21,46.6 7.21,37.67 v10.19,34.69
EPD_CS  (via drill 0.3)
  Top 0.15: v82.83,15.86 83.18,15.51 83.18,15.03 J1.12 | v71.48,17.73 70.72,16.97 R9.1 70.65,16.9 70.44,16.9 69.75,16.2 68.22,16.2 67.25,17.17 65.25,17.17 60.88,12.81 60.88,9.49 55.13,3.74 v55.13,3.67 56.03,2.77 TP10.TP | v73.35,23.96 73.35,27.56 D6.2 | v20.37,42.24 20.37,44.39 U2.11
  Bottom 0.15: v82.83,15.86 82.63,15.86 80.76,17.73 73,17.73 | v71.48,17.73 73,17.73 | v73.35,23.96 73.35,20.43 73,20.08 73,17.8 73,17.73 | v20.37,42.24 20.37,38.43 v55.13,3.67
EPD_DC  (via drill 0.3)
  Top 0.15: v83.25,14.2 83.67,14.61 83.67,14.96 J1.11 | v68.08,16.97 67.88,16.97 67.05,17.8 23.69,17.8 7.84,33.66 TP11.TP 7.84,33.73 v12.68,38.57 | v12.68,45.5 12.68,44.46 U2.5
  Bottom 0.15: v83.25,14.2 70.85,14.2 v68.08,16.97 | v12.68,38.57 v12.68,45.5
EPD_RST  (via drill 0.3)
  Top 0.15: v84.36,17.38 84.22,17.24 84.22,15.03 J1.10 | v42.46,52.08 v68.71,25.83 | v18.43,59.76 16.56,61.63 16.56,61.84 U2.21 16.56,61.91 16.56,67.17 TP12.TP
  Bottom 0.15: v84.36,17.38 84.15,17.38 75.7,25.83 v68.71,25.83 | v42.46,52.08 39,52.08 31.31,59.76 v18.43,59.76
FLASH_CS  (via drill 0.3)
  Top 0.15: 31.94,46.6 32.63,45.91 32.63,45.77 R5.1 32.7,45.7 32.84,45.57 v32.84,45.01 | 31.94,46.6 31.94,52.68 33.79,54.53 U1.1 | v33.94,44.74 34.15,44.94 34.15,45.57 D9.2 | U2.12 21.69,44.46 21.69,44.74 23.56,46.6 31.87,46.6 31.94,46.6
  Bottom 0.15: v33.94,44.74 33.11,44.74 v32.84,45.01
GDR  (via drill 0.3)
  Top 0.15: v88.17,14.2 88.17,14.96 J1.2 | v65.66,14.89 65.66,16.41 Q3.1 | v64.41,14.89 63.58,14.06 R4.1
  Bottom 0.15: v88.17,14.2 87.54,14.2 87.06,13.71 81.1,13.71 80.96,13.85 66.7,13.85 v65.66,14.89 65.59,14.89 v64.41,14.89
GND  (via drill 0.3)
  Top 0.15: U2.29_7 14.62,50.41 14.62,51.59 U2.29_8 14.62,51.66 14.62,52.84 U2.29_9 14.55,52.91 13.38,52.91 U2.29_6 13.31,52.91 12.13,52.91 U2.29_3 12.13,52.98 12.13,56.37 7.7,60.8 7.7,61.84 U2.28 7.63,61.91 7.63,65.86 15.94,74.17 15.94,85.18 J4.G1 15.94,85.25 15.94,86.28 15.18,87.05 15.18,90.09 15.94,90.86 J4.G2 15.94,90.92 13.31,93.56 13.31,100.14 D8.1 13.24,100.2 11.99,101.45 8.74,101.45 8.18,100.9 7.56,100.9 C9.2 7.49,100.83 7.49,100.34 v7.28,100.14 | U2.29_1 12.13,50.41 12.13,51.59 U2.29_2 12.2,51.59 13.31,51.59 U2.29_5 | U2.29_1 12.2,50.41 13.31,50.41 U2.29_4 13.38,50.41 14.55,50.41 U2.29_7 | v7.7,46.47 7.7,44.46 U2.1 | v9.98,48.75 11.58,50.34 12.06,50.34 U2.29_1 | TP5.TP 89.83,101.52 88.58,101.52 82.49,107.61 68.57,107.61 C6.2 68.5,107.68 67.05,107.68 66.91,107.82 BOOT_BUTTON.2 66.84,107.82 63.38,107.82 BOOT_BUTTON.1 63.31,107.89 62.61,107.89 62.2,108.31 61.16,108.31 60.95,108.1 53.68,108.1 53.47,107.89 C5.2 53.4,107.89 51.81,107.89 RESET_BUTTON.2 51.74,107.82 50.63,107.82 | 4.58,92.52 5.34,92.52 J4.P6 | 4.58,92.52 2.78,94.32 2.78,95.36 J4.G4 2.78,95.43 2.78,100.14 | J4.G3 1.74,82.27 1.74,89.61 4.58,92.45 4.58,92.52 | 50.63,102.97 50.08,102.42 48.42,102.42 IC1.3 | 50.63,102.97 52.92,102.97 C_DELAY.2 | 50.63,107.82 48.28,107.82 RESET_BUTTON.1 48.21,107.89 47.66,108.44 46.13,108.44 45.37,107.68 28.82,107.68 C10.2 28.75,107.68 27.37,107.68 27.23,107.82 CHANGE_BUTTON.2 27.09,107.82 23.69,107.82 CHANGE_BUTTON.1 23.63,107.89 23.21,108.31 21.62,108.31 21.41,108.1 5.41,108.1 2.78,105.47 2.78,100.14 | v50.63,103.6 50.63,103.04 50.63,102.97
  Top 0.15: v50.63,107.75 50.63,107.82 | v2.85,100.14 2.78,100.14 | 46.55,32.41 46.13,31.99 43.43,31.99 43.36,32.06 43.36,33.86 41.49,35.73 41.49,36.01 D10.1 41.42,36.08 41.42,39.89 34.22,47.09 D9.1 34.15,47.16 33.87,47.44 33.87,50.41 | 46.55,32.41 46.55,35.39 45.92,36.01 D12.1 45.85,36.08 44.26,36.08 D11.1 | 33.87,50.41 33.87,51.04 U1.4 33.94,51.04 35.81,51.04 37.68,52.91 U1.9 | 82,40.1 82,47.16 84.43,49.58 84.43,51.8 85.26,52.63 85.26,53.39 U3.13 85.33,53.46 85.33,53.81 86.85,55.33 89,55.33 89.83,54.5 92.25,54.5 C8.2 92.32,54.5 95.02,54.5 95.51,54.98 C10_SUPERCAP.1 95.65,55.05 98.69,55.05 113.72,40.03 114.2,40.03 R1_PWRUSB.1 114.27,39.96 114.27,38.23 115.04,37.46 C1_BAT1.2 115.11,37.4 115.24,37.4 115.94,36.7 117.67,36.7 119.88,38.92 119.88,40.16 119.88,40.23 | 82,40.1 82,39.54 D3.1 | J1.MP2 76.26,12.46 76.53,12.46 76.67,12.33 83.04,12.33 85.19,14.47 85.19,14.96 J1.8 85.26,15.03 85.26,15.44 85.47,15.65 88.93,15.65 | 88.93,15.65 89.69,14.89 89.69,12.53 J1.MP1 | 88.93,15.65 88.93,15.72 90.87,17.66 90.87,24.24 90.17,24.93 EPD_C5.2 90.17,25 EPD_C6.2 88.17,25.07 87.34,25.9 v87.34,25.97 87.34,26.04 86.85,26.52 86.85,33.73 82.97,37.6 79.1,37.6 77.71,38.99 77.71,40.03 77.78,40.1 81.93,40.1 82,40.1 | 79.44,25.07 80.41,25.07 EPD_C10.2 80.48,25.07 82.42,25.07 EPD_C9.2 82.49,25 84.43,25 EPD_C8.2 84.5,25 EPD_C7.2 86.5,25 87.27,24.24 87.27,21.81 86.92,21.47 86.78,21.47 80.76,15.44 80.76,15.03 J1.17 | 79.44,25.07 78.68,25.07 EPD_C11.2 | SJ1.1 64.62,11.77 64.62,11.56 63.79,10.73 62.48,10.73 62.27,10.94 62.27,12.67 62.41,12.81 63.51,12.81 64.69,13.99 64.83,13.99 R4.2 64.9,14.06 v64.9,16
  Top 0.15: 71.69,29.43 71.69,27.77 71.82,27.63 D6.1 71.89,27.56 71.89,24.79 73.55,23.13 73.59,23.09 | 71.69,29.43 71.69,30.12 R2.1 | v73.42,29.43 73.42,30.12 C7.2 | v72.24,29.43 71.75,29.43 71.69,29.43 | 73.59,23.09 70.85,20.36 EPD_C2.2 70.78,20.29 70.72,20.22 69.12,20.22 EPD_C1.2 69.05,20.15 v68.43,19.53 68.36,19.53 55.48,32.41 46.62,32.41 46.55,32.41 | 73.59,23.09 75.63,25.14 76.88,25.14 EPD_C12.2 | v79.44,25.14 79.44,25.07 | 120.09,40.23 122.79,40.23 125.28,37.74 C3.- 125.35,37.74 127.02,39.4 128.89,39.4 C1_BAT2.2 | 120.09,40.23 119.88,40.23 | 119.88,40.23 119.26,40.23 IC4.2 | v118.98,47.85 121.06,45.77 R2_BAT.1 | v117.88,48.34 117.88,48.89 118.08,49.1 C1_BAT.2 | U4.9 133.46,52.98 133.46,52.84 132.9,52.28 132.56,52.28 U4.4 132.42,52.28 132.07,52.28 130.82,51.04 130.82,49.03 130.69,48.89 125.01,48.89 124.7,49.2 | U4.9 133.53,52.84 134.43,52.84 U4.6 134.49,52.77 150.35,52.77 150.56,52.56 R2-USB1.1 150.63,52.56 152.5,52.56 153.05,53.12 153.33,53.12 D1.2 | U4.1 132.56,53.74 132.9,53.74 133.46,53.18 133.46,53.05 U4.9 | C2_BAT.2 127.78,54.02 125.56,54.02 122.86,51.31 122.86,50.55 123.41,50 123.62,50 MCP73831.2 123.76,50 123.9,50 124.7,49.2 | v124.66,49.17 124.7,49.2 | v120.09,40.16 120.09,40.23 | 159.01,8.45 158.32,8.45 157.9,8.86 157.9,9.14 SENSOR2.7 157.83,9.21 157.83,10.18 157.07,10.94 157.07,12.05 SENSOR2.1 | 159.01,8.45 159.42,8.86 159.42,9.14 SENSOR2.5 159.49,9.21 164.96,14.68 164.96,17.66 J3.1 165.03,17.73 165.31,17.73 165.93,18.35 165.93,49.24 165.93,49.31 | 159.01,8.45 159.01,8.38 159.01,5.26 C1.2 158.8,5.19 160.05,5.19 C2.2 160.12,5.12 160.19,5.05 168.15,5.05 TP4.TP
  Top 0.15: C4_USB.2 154.51,49.31 154.51,50.41 C5_USB.2 154.44,50.48 154.44,52.35 153.68,53.12 D1.2 | 157.07,55.47 155.96,55.47 153.68,53.18 153.4,53.18 D1.2 | 157.07,55.47 157.69,55.47 R2-USB.2 | J2.B12 164,51.31 164,51.11 J2.A1 164,51.04 164,50.9 | 164,50.9 164,49.79 164.48,49.31 J2.MP3 164.62,49.31 165.93,49.31 | 165.93,49.31 168.43,49.31 J2.MP1 | J2.A12 164,57.69 164,57.48 J2.B1 163.93,57.41 157.28,57.41 157.07,57.2 157.07,55.54 157.07,55.47 | J2.A12 164,57.76 164,59 164.48,59.49 J2.MP4 164.55,59.55 168.43,59.55 J2.MP2 | 164,50.9 164.06,50.9 165.31,50.9 165.66,51.24 165.66,57.55 165.31,57.89 164.06,57.89 J2.A12 | v21.69,50.41 14.69,50.41 U2.29_7 | v33.81,50.41 33.87,50.41
  Bottom 0.15: v9.98,48.75 v7.7,46.47 | v50.63,107.75 v50.63,103.6 | v2.85,100.14 v7.28,100.14 | v72.24,29.43 v73.42,29.43 73.49,29.43 77.78,25.14 v79.44,25.14 79.51,25.14 80.34,25.97 v87.34,25.97 | v68.43,19.53 v64.9,16 | v117.88,48.34 118.36,47.85 v118.98,47.85 119.05,47.85 119.88,47.85 | 119.88,47.85 123.35,47.85 v124.66,49.17 | v120.09,40.16 120.09,40.37 119.88,40.58 119.88,47.78 119.88,47.85 | v33.81,50.41 v21.69,50.41
  pour Top: -7.61,-16.62 193.54,-16.62 193.54,129.82 -7.61,129.82
  pour Bottom: -8.81,-18.22 194.14,-18.22 194.14,129.92 -8.81,129.92
GPIO8  (via drill 0.3)
  Top 0.15: v18.85,42.24 19.12,41.97 19.12,41.41 R1.2 | v19.33,43.28 19.33,44.18 19.12,44.39 U2.10
  Bottom 0.15: v18.85,42.24 18.85,42.8 v19.33,43.28
I2C_PW  (via drill 0.3)
  Top 0.15: C2.1 158.8,3.88 C1.1 158.73,3.95 158.73,4.09 157.62,5.19 R2_PINH.2 157.56,5.26 157.07,5.26 | 157.07,5.26 156.38,5.26 R1_PINH.2 | 157.07,5.26 157.07,5.33 157.07,9.14 SENSOR2.8 157,9.21 157,10.6 156.59,11.01 156.59,12.74 156.59,12.81 | SENSOR2.6 158.59,9.21 158.59,9.83 157.9,10.53 157.9,12.05 SENSOR2.2 157.83,12.12 157.83,12.33 157.35,12.81 156.59,12.81 | v83.11,48.96 83.01,48.96 73.78,58.19 25.06,58.19 21.69,61.56 21.69,61.84 U2.17 | 156.59,12.81 v146.82,12.81
  Bottom 0.15: v83.11,48.96 110.67,48.96 v146.82,12.81
INT_RTC  (via drill 0.3)
  Top 0.15: U3.3 86.57,62.81 87.34,63.57 87.34,65.16 R1_PINH1.1 87.41,65.23 87.68,65.51 87.68,67.52 87.54,67.66 87.51,67.66 | v26.95,55.05 16.56,44.67 16.56,44.46 U2.8 | v31.17,59.28 31.67,58.78 74.65,58.78 83.53,67.66 84.08,67.66 86.61,67.66 87.51,67.66 | 87.51,67.66 87.81,67.66 88.18,68.03 88.18,98.06 84.75,101.49 TP15.TP
  Bottom 0.15: v31.17,59.28 v26.95,55.05
IO/BOOT  (via drill 0.3)
  Top 0.15: C6.1 68.5,109 67.18,109 66.91,109.28 BOOT_BUTTON.3 66.84,109.35 63.38,109.35 BOOT_BUTTON.4 63.31,109.28 63.1,109.07 61.71,109.07 R_BOOT.2 61.64,109 61.23,108.58 v60.81,108.58 | v24.18,71.95 24.18,61.91 U2.15
  Bottom 0.15: v60.81,108.58 v24.18,71.95
IO/CHANGE  (via drill 0.3)
  Top 0.15: C10.1 28.75,109 27.5,109 27.23,109.28 CHANGE_BUTTON.3 27.09,109.35 23.69,109.35 CHANGE_BUTTON.4 23.63,109.28 23.35,109 R_CHANGE.2 22.03,108.93 21.69,108.58 v21.27,108.58 | v13.47,65.8 13.47,65.69 13.47,62.42 U2.23
  Bottom 0.15: v13.47,65.8 13.47,100.78 v21.27,108.58
MISO  (via drill 0.3)
  Top 0.15: TP6.TP 5,105.95 4.58,105.54 4.58,94.32 5.27,93.63 5.55,93.63 J4.P7 5,93.83 v4.44,93.28 | R8.1 45.65,32.62 45.65,34.28 45.85,34.49 D12.2 45.65,34.35 44.68,35.32 43.64,35.32 41.7,37.26 41.7,44.94 v36.23,50.41 | v32.57,52.68 32.57,52.79 33.37,53.59 U1.2 33.87,53.6 33.87,53.95 34.5,54.57 34.5,55.12 34.08,55.54 14.28,55.54 8.94,60.87 8.94,61.84 U2.27 8.88,61.91 8.88,62.26 v8.11,63.02
  Bottom 0.15: v36.23,50.41 34.43,50.41 32.57,52.28 v32.57,52.68 | v4.44,93.28 4.44,66.69 v8.11,63.02
MOSI  (via drill 0.3)
  Top 0.15: v80.9,13.3 82.14,14.54 82.14,14.96 J1.14 | v60.4,10.32 52.78,2.7 TP7.TP | R7.1 44.05,32.62 44.05,34.35 44.19,34.49 D11.2 43.99,34.35 v42.95,35.39 | v41.83,46.54 41.83,50.93 U1.5 | v16.15,45.5 15.32,44.67 15.32,44.46 U2.7 | v6.31,66.06 4.3,68.07 4.3,87.95 5.55,89.19 J4.P3
  Bottom 0.15: v80.9,13.3 77.92,13.3 77.47,12.85 | 77.47,12.85 74.94,10.32 v60.4,10.32 | 42.53,35.8 42.53,45.84 v41.83,46.54 40.79,45.5 32.7,45.5 32.49,45.29 25.36,45.29 25.15,45.5 v16.15,45.5 16.08,45.5 15.59,45.98 13.79,45.98 10.75,49.03 10.75,52.28 10.95,52.49 10.95,61.42 v6.31,66.06 | v42.95,35.39 42.53,35.8 | 42.53,35.8 42.43,35.91 42.46,35.94 43.22,36.7 43.5,36.7 43.85,36.36 43.85,31.92 62.2,13.57 76.74,13.57 77.43,12.88 77.47,12.85
N$1  (via drill 0.3)
  Top 0.15: v151.74,53.81 150.63,53.81 R2-USB1.2 | v163.03,53.18 163.93,53.18 J2.A5
  Bottom 0.15: v151.74,53.81 162.4,53.81 v163.03,53.18
N$2
  Top 0.15: R2-USB.1 157.76,56.72 162.89,56.72 163.44,56.16 163.93,56.16 J2.B5
N$3  (via drill 0.3)
  Top 0.15: C1_BAT1.1 116.35,37.46 116.35,39.4 D2.1 116.42,39.33 118.57,39.33 | 118.57,39.33 119.19,39.33 IC4.3 | 118.57,39.33 118.57,39.4 118.57,40.72 119.05,41.2 119.19,41.2 IC4.1 119.26,41.27 119.81,40.72 v120.37,40.72 | v130.13,47.44 131.1,47.44 Q1.2
  Bottom 0.15: v130.13,47.44 127.09,47.44 v120.37,40.72
N$5  (via drill 0.3)
  Top 0.15: v115.31,49.79 114.27,50.83 R1_BAT.1 | v122.72,49.79 123.41,49.1 123.62,49.1 MCP73831.1
  Bottom 0.15: v122.72,49.79 v115.31,49.79
N$6
  Top 0.15: C4.1 93.15,36.91 92.67,36.91 91.28,35.52 D4.1 91.21,35.52 88.86,37.88 82.28,37.88 80.69,39.47 78.54,39.47 D3.2
N$7
  Top 0.15: CHG_LED.C 118.08,50.9 115.59,50.9 R1_BAT.2
N$8
  Top 0.15: R2_BAT.2 121.13,47.09 121.13,49.03 MCP73831.5
N$10  (via drill 0.3)
  Top 0.15: v86.3,14.2 86.64,14.54 86.64,14.96 J1.5 | v73.49,19.94 72.03,19.94 71.13,19.04 70.85,19.04 EPD_C2.1
  Bottom 0.15: v86.3,14.2 85.12,14.2 79.37,19.94 v73.49,19.94
N$11  (via drill 0.3)
  Top 0.15: v86.92,14.2 87.2,14.47 87.2,14.96 J1.4 | v73.83,20.43 72.1,20.43 71.27,19.6 69.82,19.6 69.12,18.91 EPD_C1.1
  Bottom 0.15: v86.92,14.2 80.69,20.43 v73.83,20.43
N$12
  Top 0.15: IC1.5 51.19,104.29 52.92,104.29 C_DELAY.1
N$14
  Top 0.15: R_CAPACITOR.2 83.73,50 83.73,51.52 84.77,52.56 84.77,60.66 86.02,61.91 86.02,66 86.99,66.97 D7.1
N$20  (via drill 0.3)
  Top 0.15: v77.16,22.09 77.16,15.03 J1.24 | v76.67,23.13 76.67,23.61 76.88,23.82 EPD_C12.1
  Bottom 0.15: v77.16,22.09 77.16,22.64 v76.67,23.13
N$22
  Top 0.15: J1.22 78.26,15.03 78.26,21.54 80.41,23.68 EPD_C10.1
N$23
  Top 0.15: J1.20 79.23,15.03 79.23,18.49 84.43,23.68 EPD_C8.1
N$25  (via drill 0.3)
  Top 0.15: v86.78,21.95 80.2,15.37 80.2,15.03 J1.18 | v88.37,22.99 88.37,23.55 88.24,23.68 EPD_C6.1
  Bottom 0.15: v86.78,21.95 87.34,21.95 v88.37,22.99
N$26
  Top 0.15: J1.19 79.72,15.03 79.72,16.97 86.44,23.68 EPD_C7.1
PREVGH  (via drill 0.3)
  Top 0.15: J1.21 78.75,15.03 78.75,20.01 82.42,23.68 EPD_C9.1 82.49,23.68 v83.18,24.38 | v87.68,26.45 87.68,31.86 D5.1
  Bottom 0.15: v87.68,26.45 87.68,26.25 87.82,26.11 87.82,25.83 86.37,24.38 v83.18,24.38
PREVGL  (via drill 0.3)
  Top 0.15: J1.23 77.71,15.03 77.71,22.85 78.61,23.75 EPD_C11.1 78.68,23.82 78.75,23.89 v79.44,23.89 | v88.51,26.11 88.51,32.34 87.75,33.1 87.75,35.46 D4.2
  Bottom 0.15: v88.51,26.11 86.3,23.89 v79.44,23.89
RESE
  Top 0.15: J1.3 87.68,14.96 87.68,14.34 83.67,10.32 73.55,10.32 64.69,1.45 58.94,1.45 58.18,2.22 58.18,3.6 66.7,12.12 66.7,12.26 R3.1 66.77,12.33 67.46,13.02 67.46,14.34 66.91,14.89 66.91,16.41 Q3.2
RESE'  (via drill 0.3)
  Top 0.15: SJ1.2 63.17,11.84 63.17,12.05 63.93,12.81 64.76,12.81 65.45,13.5 66.7,13.5 R3.2 66.77,13.64 66.84,13.71 v66.84,14.34 | v68.71,20.91 69.19,21.4 69.19,28.81 71.62,31.23 71.62,31.44 R2.2
  Bottom 0.15: v68.71,20.91 68.71,19.88 68.92,19.67 68.92,18.42 66.84,16.34 v66.84,14.34
RESET  (via drill 0.3)
  Top 0.15: C5.1 53.4,109.21 51.88,109.21 51.81,109.28 RESET_BUTTON.3 51.74,109.28 50.36,109.28 49.39,108.31 v49.32,108.31 48.28,109.35 RESET_BUTTON.4 48.21,109.28 48.14,109.21 46.69,109.21 R_RESET.2 | v48.42,106.44 48.42,104.36 IC1.1 | v11.51,49.65 10.26,48.41 10.26,44.46 U2.3
  Bottom 0.15: v49.32,108.31 48.42,107.41 v48.42,106.44 48.42,106.37 48.42,99.72 11.51,62.81 v11.51,49.65
RTC_RST
  Top 0.15: U2.16 22.93,61.84 22.93,61.63 26.07,58.49 81.36,58.49 85.26,62.39 85.26,62.74 U3.4
RX
  Top 0.15: U2.24 12.95,62.09 12.95,66.68 13.52,67.24 TP2.TP
SCK  (via drill 0.3)
  Top 0.15: v14.07,45.5 14.07,44.46 U2.6 | v14.07,35.04 14.07,34 14.35,33.73 TP8.TP | v6.31,65.44 4.03,67.73 4.03,90.37 5.07,91.41 5.55,91.41 J4.P5 | v76.81,12.81 81.03,12.81 82.7,14.47 82.7,14.96 J1.13 | v42.32,31.92 41.7,32.55 R6.1 41.63,32.62 41.49,32.76 41.49,34.49 D10.2 | v43.36,36.22 43.36,50.28 41.63,52.01 41.63,52.28 U1.6
  Bottom 0.15: v14.07,35.04 14.07,43.77 | 14.07,43.77 v14.07,45.5 14,45.36 10.47,48.89 10.47,52.42 10.68,52.63 10.68,61.08 v6.31,65.44 | v76.81,12.81 61.44,12.81 v42.32,31.92 42.32,31.99 43.43,33.1 43.43,34.9 | v43.36,36.22 43.36,35.59 43.43,35.52 43.43,34.9 | 14.07,43.77 14.14,43.77 33.94,43.77 42.81,34.9 43.36,34.9 43.43,34.9
SCL  (via drill 0.3)
  Top 0.15: v135.26,53.25 134.49,53.25 U4.7 | v164.96,23.55 164.96,20.71 J3.4 | v157.62,3.19 157.62,3.88 R2_PINH.1 | v158.8,12.95 159.42,12.33 159.42,12.12 SENSOR2.4 | v19.19,60.25 17.88,61.56 17.88,61.84 U2.20 | v88.86,54.85 88.86,53.67 89.07,53.46 U3.16
  Bottom 0.15: 157.62,12.95 157.62,16.14 164.96,23.48 v164.96,23.55 v135.26,53.25 135.19,53.25 134.63,53.25 133.04,54.85 88.93,54.85 v88.86,54.85 88.1,55.61 82.9,55.61 78.46,60.05 19.39,60.05 v19.19,60.25 | 157.62,12.95 v157.62,3.19 | v158.8,12.95 157.69,12.95 157.62,12.95
SDA  (via drill 0.3)
  Top 0.15: 146.68,13.3 146.34,12.95 146.34,12.57 154.96,3.95 156.31,3.95 R1_PINH.1 | 146.68,13.3 157.69,13.3 157.8,13.19 | 157.8,13.19 158.59,12.4 158.59,12.12 SENSOR2.3 | v163.93,19.32 164.27,19.67 164.96,19.67 J3.3 | v158.11,13.5 157.83,13.23 157.8,13.19 | v133.18,54.08 133.87,54.08 134.15,53.81 134.43,53.81 U4.8 | v87.61,54.85 87.61,53.67 87.82,53.46 U3.15 | v19.96,60.73 19.12,61.56 19.12,61.84 U2.19 | v84.29,54.85 v83.04,56.09 | v146.68,22.23 146.68,13.37 146.68,13.3
  Bottom 0.15: v158.11,13.5 v163.93,19.32 | v19.96,60.73 20.36,60.33 78.8,60.33 v83.04,56.09 | v84.29,54.85 87.54,54.85 v87.61,54.85 88.58,53.88 131.66,53.88 131.86,54.08 v133.18,54.08 133.18,54.02 146.68,40.51 v146.68,22.23
SRC  (via drill 0.3)
  Top 0.15: C4.2 93.15,35.59 93.15,33.86 91.21,31.92 D5.2 91.14,31.92 v89,31.92 | v64.34,20.84 66.21,18.97 66.21,18.56 Q3.3 | L1.1 80.05,37.07 v73.96,37.07
  Bottom 0.15: v64.34,20.84 64.34,27.46 v73.96,37.07 78.73,37.07 83.87,31.92 v89,31.92
SS_SD  (via drill 0.3)
  Top 0.15: D8.2 11.71,100.2 11.09,100.83 9.29,100.83 R10.1 9.29,100.76 v9.29,90.65 | v4.93,86.28 4.58,86.63 4.58,87.39 5.27,88.09 5.97,88.09 J4.P2 | v11.44,48.96 11.44,44.46 U2.4
  Bottom 0.15: v9.29,90.65 v4.93,86.28 4.93,86.22 11.23,79.92 11.23,52.35 11.02,52.15 11.02,49.51 11.44,49.1 v11.44,48.96
TX
  Top 0.15: U2.25 11.44,61.91 11.44,66.48 10.75,67.17 TP1.TP
USB_D+  (via drill 0.3)
  Top 0.15: v131.52,54.36 131.73,54.57 151.6,54.57 152.02,54.15 153.33,54.15 D1.1 | v25.5,45.77 24.18,44.46 U2.14
  Bottom 0.15: v131.52,54.36 88.72,54.36 87.75,55.33 46.34,55.33 36.78,45.77 v25.5,45.77
USB_D-  (via drill 0.3)
  Top 0.15: v131.31,50.9 150.08,50.9 151.39,52.22 153.33,52.22 D1.3 | v35.05,47.16 v38.79,47.16 | v24.25,45.98 22.93,44.67 22.93,44.46 U2.13
  Bottom 0.15: v131.31,50.9 42.53,50.9 v38.79,47.16 | v35.05,47.16 25.43,47.16 v24.25,45.98
VBAT
  Top 0.3: U4.2 132.56,53.25 132.56,52.84 U4.3 132.35,52.77 132,52.77 | 127.85,51.87 127.85,52.77 C2_BAT.1 | 129.47,50.24 130.13,49.58 Q1.3 | 129.47,50.24 127.85,51.87 | 132,52.77 129.58,50.34 129.47,50.24 | MCP73831.3 123.69,50.97 126.88,50.97 127.71,51.8 127.85,51.87 | TP3.TP 130.96,64.47 130.96,53.88 131.93,52.91 132,52.77
VBUS
  Top 0.3: D1.5 155.82,53.12 155.41,53.12 154.92,52.63 154.92,51.38 155.75,50.55 C5_USB.1 155.82,50.41 155.82,49.31 C4_USB.1 155.69,49.17 155.13,48.61 155.06,48.61 152.98,46.54 151.46,46.54 PFMF.050.1.2 151.25,46.47 130.34,46.47 129.37,47.44 Q1.1 129.16,47.51 123.9,47.51 121.13,50.28 121.13,50.76 MCP73831.4 | R1_PWRUSB.2 114.27,41.34 116.21,41.34 116.35,41.48 D2.2 116.42,41.62 116.42,46.12 119.33,49.03 C1_BAT.1 119.47,49.17 119.47,50.83 CHG_LED.A 119.61,50.9 121.06,50.9 MCP73831.4 | TP14.TP 128.19,64.33 128.19,58.03 121.2,51.04 MCP73831.4
VRTC
  Top 0.3: C10_SUPERCAP.2 95.51,52.91 95.3,53.12 92.32,53.12 C8.1 92.18,53.05 90.38,53.05 89.41,52.08 87.47,52.08 86.64,52.91 U3.14 86.5,53.39 86.5,52.98 85.05,51.52 85.05,50 R_CAPACITOR.1
VUSB
  Top 0.3: J2.A9 164,56.92 164,56.72 J2.B4 164.13,56.65 164.62,56.65 164.83,56.44 164.83,52.35 164.69,52.22 164.13,52.22 J2.B9 164,52.15 164,51.87 J2.A4 163.86,51.8 159.93,51.8 155.9,47.77 PFMF.050.1.1

## Text on the board
tPlace: MISO | INT_RTC | 3V3 | GND | TX | RX | EPD_RST | EPD_3V3_C | VBUS | VBAT | EPD_BUSY | SCK | EPD_DC | GND | MOSI | EPD_CS | EPD_3V3